# Altium PCB power_supply.PcbDoc
Units mm, origin at the board's own origin, x right, y up, seen from the top; angles counter-clockwise.
Board outline 150 x 100 mm, 2 copper layers (Top Layer, Bottom Layer); 64 components, 31 nets, 151 pads, 4 vias.
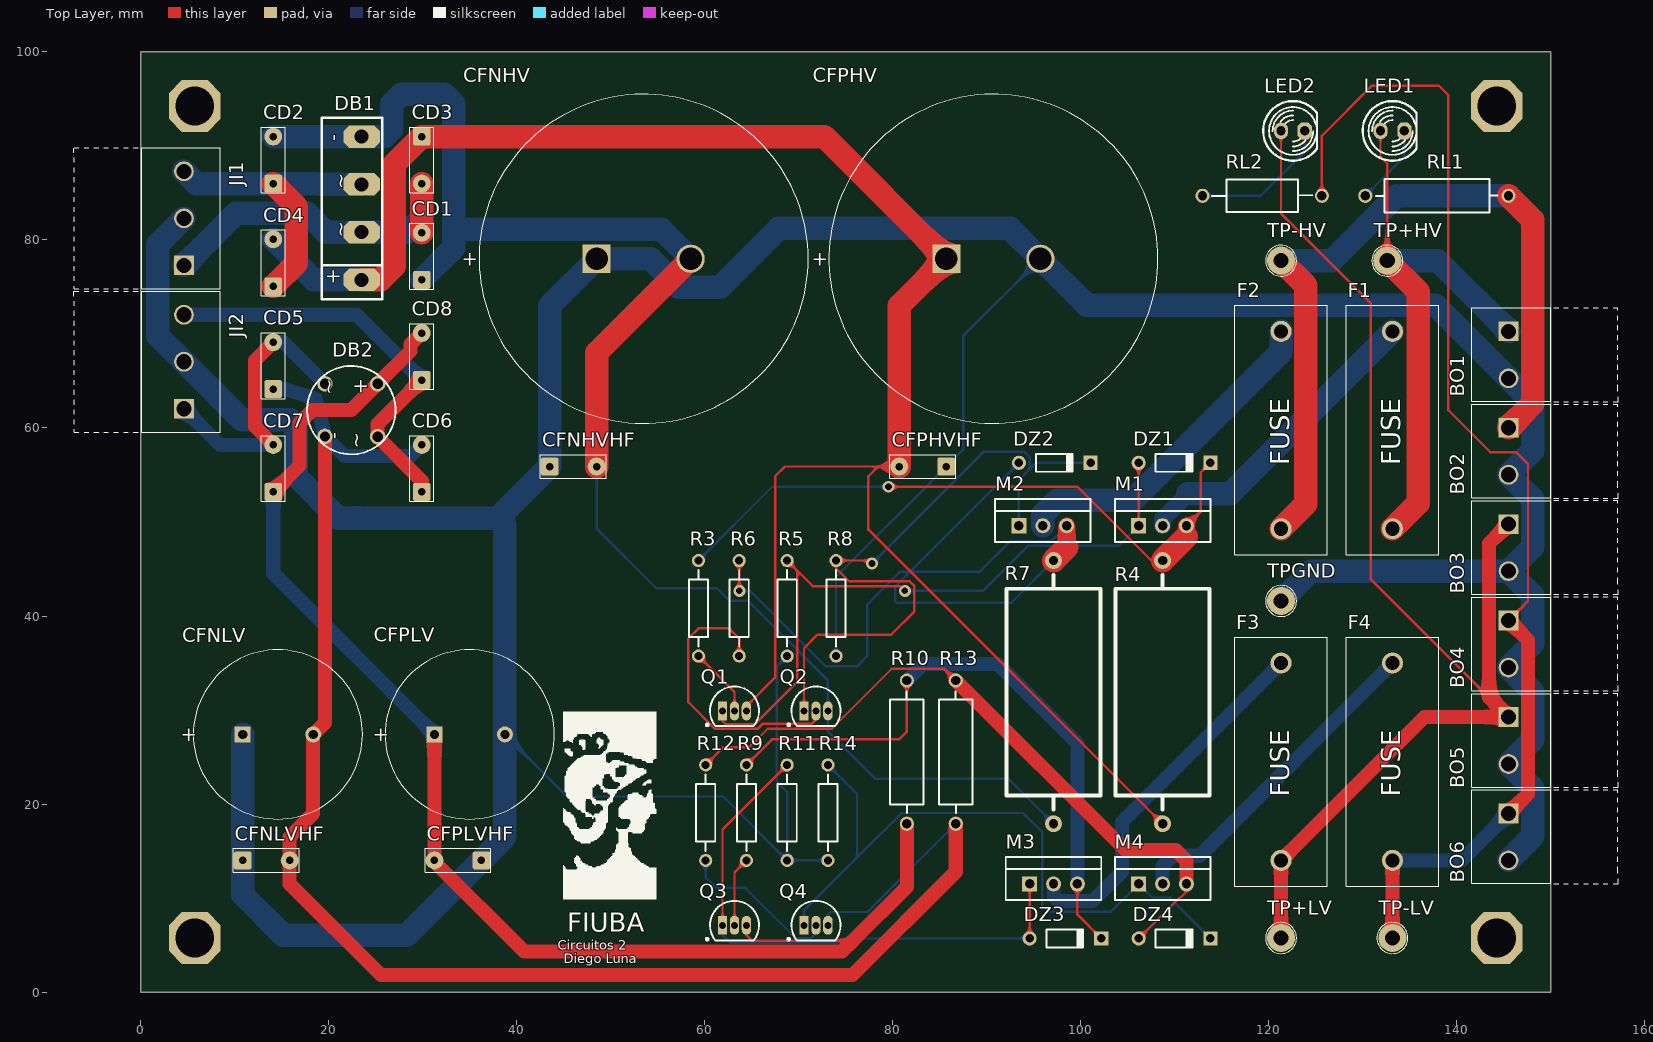
[diagram p0: Top Layer view]
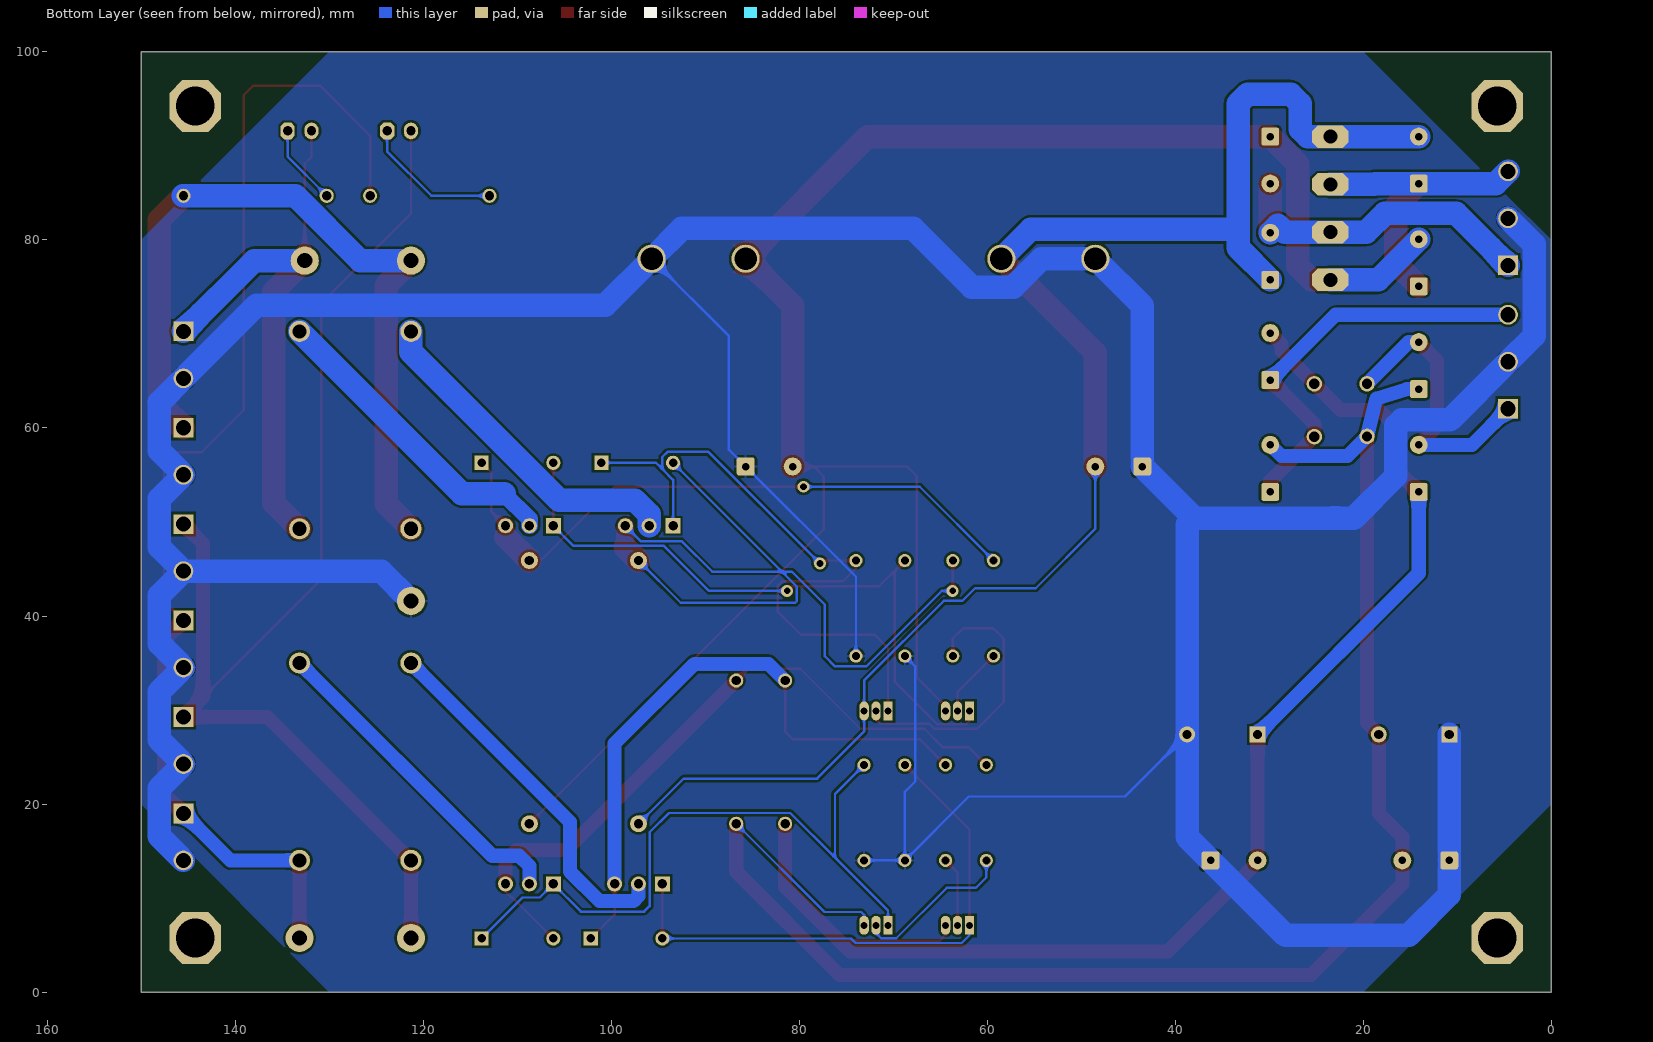
[diagram p1: Bottom Layer view, seen from below]

## Layer stack, top to bottom
Top Solder: solder mask 0.0102, Solder Resist, Dk 3.5
Top Layer: signal copper 0.0356
Dielectric 1: dielectric 0.32, FR-4, Dk 4.8
Bottom Layer: signal copper 0.0356
Bottom Solder: solder mask 0.0102, Solder Resist, Dk 3.5

## Board outline
0,0 150,0 150,100 0,100

## Design rules (kind name [scope] priority, off if disabled: settings)
Clearance [All] p1: gap=0.254 ignorepadtopadclearanceinfootprint=FALSE except(0: Arc-Hole Track-Hole SMDPad-Hole THPad-Hole Via-Hole Fill-Hole Poly-Hole Region-Hole Text-Hole)
Height [All] p1: minheight=0 maxheight=70 prefheight=12.7
HoleSize HoleSize_Exceptions [InComponent('BO') OR InComponent('JI') OR IsOctagonalPad] p1: absolutevalues=TRUE maxlimit=5 minlimit=0.025 maxpercent=80.000 minpercent=20.000
HoleSize [All] p2: absolutevalues=TRUE maxlimit=2.54 minlimit=0.025 maxpercent=80.000 minpercent=20.000
MinimumSolderMaskSliver MinimumSolderMaskSliver_Exceptions [HasFootprint('TO-92-1') OR HasFootprint('TO-225')] p1: minsoldermaskwidth=0.06
MinimumSolderMaskSliver [All] p2: minsoldermaskwidth=0.254
PolygonConnect [All] p1: connectstyle=Relief reliefconductorwidth=0.254 reliefentries=4 polygonreliefangle="90 Angle" airgapwidth=0.254
RoomDefinition power_supply [InComponentClass('power_supply')] p1: confinementstyle=ConfineIn formatcopy=TRUE lockcomponents=FALSE outline -7.2,0 157.3,0 157.3,100 -7.2,100
RoutingLayers RoutingLayers_GND [InNet('GND')] p1: top layer_v5=FALSE bottom layer_v5=TRUE
RoutingLayers [All] p2: top layer_v5=TRUE bottom layer_v5=TRUE
RoutingVias [All] p1: holewidth=0.711 width=1.27 viastyle="Through Hole" minholewidth=0.711 minwidth=1.27 maxholewidth=0.711 maxwidth=1.27
SilkToSilkClearance SilkToSilkClearance_Exceptions [OnTopSilkscreen AND IsArc vs OnTopSilkscreen AND IsText AND (StringText = '+')] p1: silktosilkclearance=0.1
SilkToSilkClearance [All] p2: silktosilkclearance=0.254
SilkToSolderMaskClearance SilkToSolderMaskClearance_Exceptions3 [(IsTrack And OnTopSilkscreen) OR (IsPad And OnCopper) vs (IsTrack And OnTopSilkscreen) OR (IsPad And OnCopper)] p1: minsilkscreentomaskgap=0 clearancetoexposedcopper=TRUE
SilkToSolderMaskClearance SilkToSolderMaskClearance_Exceptions2 [HasFootprint('LED_5MM_GREEN') OR HasFootprint('LED_5MM_YELLOW') OR HasFootprint('Tantalum Electrolytic 4.5mmx8.0mmx0.254mm-CLEAN') OR HasFootprint('Cer. pitch 5.0mm height 5.5mm') OR HasFootprint('Cer. pitch 5.08mm height 6.00mm') OR HasFootprint('Cer. pitch 5.0mm height 6.6mm') vs HasFootprint('LED_5MM_GREEN') OR HasFootprint('LED_5MM_YELLOW') OR HasFootprint('Tantalum Electrolytic 4.5mmx8.0mmx0.254mm-CLEAN') OR HasFootprint('Cer. pitch 5.0mm height 5.5mm') OR HasFootprint('Cer. pitch 5.08mm height 6.00mm') OR HasFootprint('Cer. pitch 5.0mm height 6.6mm')] p2: minsilkscreentomaskgap=0 clearancetoexposedcopper=TRUE
SilkToSolderMaskClearance SilkToSolderMaskClearance_Exceptions [HasFootprint('TP-THT-MULTI') vs HasFootprint('TP-THT-MULTI')] p3: minsilkscreentomaskgap=0.08 clearancetoexposedcopper=TRUE
SilkToSolderMaskClearance [IsPad] p4: minsilkscreentomaskgap=0.254 clearancetoexposedcopper=TRUE
SolderMaskExpansion [All] p1: expansion=0.102
Width "H Power route" [InNetClass('H Power route')] p1: maxlimit=5 minlimit=0.254 preferedwidth=0.254 // Width of low voltage power
Width "L Power route" [InNetClass('L Power route')] p2: maxlimit=3 minlimit=0.254 preferedwidth=0.254 // Width of low voltage power
Width [All] p3: maxlimit=0.508 minlimit=0.254 preferedwidth=0.254
24 further rules are at their usual default settings.

## Classes and differential pairs
net class "H Power route": +HV +HVU -HV -HVU GND HVLIN1 HVLIN2 PowerH1 PowerH2 PowerH3 PowerH4
net class "L Power route": +LV +LVU -LV -LVU GND LVLIN1 LVLIN2 PowerL1 PowerL2 PowerL3 PowerL4

## Components (designator, comment, footprint, x,y, rotation, side; value= is the part's Value field where it differs from the comment)
BO1 "Bornera +HV" TE-C-282822-2-C-PLUGGED 145.5,67.78 r270 top
BO2 "Bornera -HV" TE-C-282822-2-C-PLUGGED 145.5,57.524 r270 top
BO3 "Bornera +LV" TE-C-282822-2-C-PLUGGED 145.5,47.268 r270 top
BO4 "Bornera -LV" TE-C-282822-2-C-PLUGGED 145.5,37.012 r270 top
BO5 "Bornera +LV" TE-C-282822-2-C-PLUGGED 145.5,26.756 r270 top
BO6 "Bornera -LV" TE-C-282822-2-C-PLUGGED 145.5,16.5 r270 top
CD1 "Cer. 100n 500V 10%" "Cer. pitch 5.0mm height 5.5mm" 29.9,78.26 r90 top value=100n
CD2 "Cer. 100n 500V 10%" "Cer. pitch 5.0mm height 5.5mm" 14.1,88.5 r90 top value=100n
CD3 "Cer. 100n 500V 10%" "Cer. pitch 5.0mm height 5.5mm" 29.9,88.5 r270 top value=100n
CD4 "Cer. 100n 500V 10%" "Cer. pitch 5.0mm height 5.5mm" 14.1,77.567 r90 top value=100n
CD5 "Cer. 100n 500V 10%" "Cer. pitch 5.0mm height 5.5mm" 14.1,66.633 r90 top value=100n
CD6 "Cer. 100n 500V 10%" "Cer. pitch 5.0mm height 5.5mm" 29.9,55.7 r90 top value=100n
CD7 "Cer. 100n 500V 10%" "Cer. pitch 5.0mm height 5.5mm" 14.1,55.7 r90 top value=100n
CD8 "Cer. 100n 500V 10%" "Cer. pitch 5.0mm height 5.5mm" 29.9,67.6 r90 top value=100n
CFNHV "Al. Elect. 10000u 100V 20% 85º" "Al. Electrolytic 35.0mmx50.0mmx10mm-CLEAN" 53.5,78 r0 top value=10000µ
CFNHVHF "Cer. 100n 500V 10%" "Cer. pitch 5.0mm height 5.5mm" 46,55.9 r0 top value=100n
CFNLV "Al. Elect. 4700u 35V 20%" "Al. Electrolytic 18.0mmx36.0mmx7.5mm" 14.6,27.4 r0 top value=4700µ
CFNLVHF "Cer. 100n 500V 10%" "Cer. pitch 5.0mm height 5.5mm" 13.35,14 r0 top value=100n
CFPHV "Al. Elect. 10000u 100V 20% 85º" "Al. Electrolytic 35.0mmx50.0mmx10mm-CLEAN" 90.7,78 r0 top value=10000µ
CFPHVHF "Cer. 100n 500V 10%" "Cer. pitch 5.0mm height 5.5mm" 83.2,55.9 r180 top value=100n
CFPLV "Al. Elect. 4700u 35V 20%" "Al. Electrolytic 18.0mmx36.0mmx7.5mm" 35,27.4 r0 top value=4700µ
CFPLVHF "Cer. 100n 500V 10%" "Cer. pitch 5.0mm height 5.5mm" 33.75,14 r180 top value=100n
DB1 "KBL10" KBL 24.516,83.38 r90 top
DB2 "WM10" WOM-4 22.4,61.9 r270 top
DZ1 "1N5240B" DO-35-0.3mil 106.16,56.3 r0 top
DZ2 "1N5240B" DO-35-0.3mil 93.42,56.3 r0 top
DZ3 "1N5240B" DO-35-0.3mil 94.56,5.7 r0 top
DZ4 "1N5240B" DO-35-0.3mil 106.16,5.7 r0 top
F1 "Fuse 4A" "DINKLE FUSE HOLDER 5X20" 133.154,59.78 r90 top
F2 "Fuse 4A" "DINKLE FUSE HOLDER 5X20" 121.3,59.78 r90 top
F3 "Fuse 1.5A" "DINKLE FUSE HOLDER 5X20" 121.3,24.5 r90 top
F4 "Fuse 1.5A" "DINKLE FUSE HOLDER 5X20" 133.154,24.5 r90 top
JI1 "Bornera de conexión secundario 1 del transformador" TE-C-282822-3-C-PLUGGED 4.6,82.3 r90 top
JI2 "Bornera de conexión secundario 2 del transformador" TE-C-282822-3-C-PLUGGED 4.6,67.045 r90 top
LED1 "Alta tensión" LED_5MM_GREEN 133.154,91.6 r0 top
LED2 "Baja tensión" LED_5MM_YELLOW 122.57,91.6 r0 top
M1 "IRF5210" TO-220-FULL 108.7,49.6 r90 top value=Value
M2 "IRF540" TO-220-FULL 95.96,49.6 r90 top value=Value
M3 "IRF5210" TO-220-FULL 97.1,11.5 r90 top value=Value
M4 "IRF540" TO-220-FULL 108.7,11.5 r90 top value=Value
Q1 "BC327-25" TO-92-1 63.163,29.9 r270 top
Q2 "BC337-25" TO-92-1 71.83,29.9 r270 top
Q3 "BC327-25" TO-92-1 63.163,7.1 r270 top
Q4 "BC337-25" TO-92-1 71.83,7.1 r270 top
R3 "Resistor 10K 1/4W 5%" AXIAL-0.4-E24-0_25W-10k 59.333,40.82 r90 top value=10K
R4 "Cemented resistor 0.27 5W 5%" "Cemented resistor 0.27 5W 5%" 108.7,31.9 r90 top value=0.27
R5 "Resistor 10K 1/4W 5%" AXIAL-0.4-E24-0_25W-10k 68.767,40.82 r90 top value=10K
R6 "Resistor 10K 1/4W 5%" AXIAL-0.4-E24-0_25W-10k 63.667,40.82 r90 top value=10K
R7 "Cemented resistor 0.27 5W 5%" "Cemented resistor 0.27 5W 5%" 97.1,31.9 r90 top value=0.27
R8 "Resistor 10K 1/4W 5%" AXIAL-0.4-E24-0_25W-10k 73.967,40.82 r90 top value=10K
R9 "Resistor 10K 1/4W 5%" AXIAL-0.4-E24-0_25W-10k 64.433,19.08 r90 top value=10K
R10 "Resistor 0.62 2W 5%" AXIAL-0.6-E24-2W-0.62 81.5,25.52 r90 top value=0.62
R11 "Resistor 10K 1/4W 5%" AXIAL-0.4-E24-0_25W-10k 68.767,19.08 r90 top value=10K
R12 "Resistor 10K 1/4W 5%" AXIAL-0.4-E24-0_25W-10k 60.1,19.08 r90 top value=10K
R13 "Resistor 0.62 2W 5%" AXIAL-0.6-E24-2W-0.62 86.7,25.52 r90 top value=0.62
R14 "Resistor 10K 1/4W 5%" AXIAL-0.4-E24-0_25W-10k 73.1,19.08 r90 top value=10K
RL1 "Resistor 20K 1W 5%" AXIAL-0.6-E24-1W-20K 137.88,84.7 r180 top value=20K
RL2 "Resistor 5.6K 1/2W 5%" AXIAL-0.5-E24-0_5W-5.6K 119.3,84.7 r180 top value=5.6K
TP+HV "TESTPOINT_THT" TP-THT-MULTI 132.6,77.8 r90 top
TP+LV "TESTPOINT_THT" TP-THT-MULTI 121.3,5.75 r90 top
TP-HV "TESTPOINT_THT" TP-THT-MULTI 121.3,77.8 r90 top
TP-LV "TESTPOINT_THT" TP-THT-MULTI 133.154,5.75 r90 top
TPGND "TESTPOINT_THT" TP-THT-MULTI 121.3,41.6 r90 top
? "Comment" "FIUBA LOGO - SMALL1" 49.3,16.597 r0 top

## Footprints (in the part's own frame and the unit in brackets; to place one, negate y for a bottom-side part, rotate by r counter-clockwise, add the part's x,y. Pads: shape width x height; smd on the part's side, far side on the other; paste and mask are expansions set on the pad)
"Al. Electrolytic 18.0mmx36.0mmx7.5mm" [mm] "Polarized capacitors, Aluminum Electrolytic Capacitors, 2-Leads, Body 18.0mmx36.0mmx7.5mm"
  rect 1.7x1.7 hole 1: 1(-3.75,0)
  round 1.7 hole 1: 2(3.75,0)
  silkscreen extent -9,-9 9,9, body extent -9,-9 9,9, height 37
"Al. Electrolytic 35.0mmx50.0mmx10mm-CLEAN" [mm] "Polarized capacitors, Aluminum Electrolytic Capacitors, 2-Leads, Body 35.0mmx50.0mmx10mm"
  rect 3x3 / inner round 3 / far side round 3 hole 2.4: 1(-5,0)
  round 3 hole 2.4: 2(5,0)
  silkscreen extent -17.5,-17.5 17.5,17.5, body extent -18,-18 18,18, height 51.99
AXIAL-0.4-E24-0_25W-10k [mm] "Axial Device, Thru-Hole; 2 Leads; 0.4 in Pin Spacing"
  round 1.4 hole 0.85: 1(-5.08,0) 2(5.08,0)
  silkscreen extent -4.06,-1.02 4.06,1.02, body extent -5.38,-1.2 5.38,1.2, height 2.41
AXIAL-0.5-E24-0_5W-5.6K [mm] "Axial Device, Thru-Hole; 2 Leads; 0.5 in Pin Spacing"
  round 1.5 hole 1: 1(-6.35,0) 2(6.35,0)
  silkscreen extent -5.33,-1.73 5.33,1.73, body extent -6.73,-1.87 6.73,1.87, height 4.3
AXIAL-0.6-E24-1W-20K [mm] "Axial Device, Thru-Hole; 2 Leads; 0.6 in Pin Spacing"
  round 1.5 hole 1: 1(-7.62,0) 2(7.62,0)
  silkscreen extent -6.48,-1.78 6.48,1.78, body extent -7.97,-2.5 7.97,2.5, height 5.5
AXIAL-0.6-E24-2W-0.62 [mm] "Axial Device, Thru-Hole; 2 Leads; 0.6 in Pin Spacing"
  round 1.5 hole 1: 1(-7.62,0) 2(7.62,0)
  silkscreen extent -6.48,-1.78 6.48,1.78, body extent -8.02,-2 8.02,2, height 4.5
"Cemented resistor 0.27 5W 5%" [mm] "Cemented resistor 0.27O 5% 5W"
  round 1.8 / inner round 1.4 / far side round 1.8 hole 1: 1(-14,0) 2(14,0)
  silkscreen extent -12.5,-5 12.5,5, body extent -14.35,-5 14.35,5, height 11
"Cer. pitch 5.0mm height 5.5mm" [mm] "Radial ceramic capacitor pitch 5.0mm height 5.5mm"
  round 0.508 on Mech15: 0(0,0)
  rrect25% 1.905x1.905 hole 0.8: 1(-2.5,0)
  round 1.905 hole 0.8: 2(2.5,0)
  silkscreen extent -3.5,-1.27 3.5,1.27, body extent -2.8,-1 2.8,1, height 5.47
"DINKLE FUSE HOLDER 5X20" [mm] "5.00mm - Open Vertical PCB Header - 02p"
  round 2.25 hole 1.5: 1(-10.5,0) 2(10.5,0)
  silkscreen extent -13.25,-4.9 13.25,4.9, body extent -12.25,-4.8 12.25,4.8, height 11.7
DO-35-0.3mil [mm] "Diode, Axial; Body 3.8 x 1.9 mm (LxDia. max), Lead Dia. 0.53 mm (max)"
  round 1.5 hole 0.9: 1(0,0)
  rect 1.5x1.5 hole 0.9: 2(7.62,0)
  silkscreen extent 1.8,-0.95 5.8,0.95, body extent -0.26,-1.02 7.88,1, height 2.21
"FIUBA LOGO - SMALL1" [mm] "FIUBA LOGO"
  silkscreen extent -4.37,-6.7 5.54,13.22
KBL [mm]
  oct 2.4x3.9 hole 1.5: 1(-7.62,1.016) 2(-2.54,1.016) 3(2.54,1.016) 4(7.62,1.016)
  silkscreen extent -9.68,-1.19 9.6,5.26, body extent -9.8,-1.12 9.7,5.38, height 16.32
LED_5MM_GREEN [mil] "LED 5mm GREEN"
  oval 60x70 hole 39.37: A(-50,0)
  oct 60x70 hole 39.37: K(50,0)
  silkscreen extent -125,-125 100,125, body extent -122,-119 94,117, height 352
LED_5MM_YELLOW [mil] "LED 5mm YELLOW"
  oval 60x70 hole 39.37: A(-50,0)
  oct 60x70 hole 39.37: K(50,0)
  silkscreen extent -125,-125 100,125, body extent -118,-118 98,118, height 352
TE-C-282822-2-C-PLUGGED [mm] "5.00mm - Open Vertical PCB Header - 02p"
  rect 2.1x2.1 hole 1.6: 1(-2.5,0)
  round 2.1 hole 1.6: 2(2.5,0)
  silkscreen extent -5.02,-3.9 4.97,11.65, body extent -5.03,-3.87 4.98,11.63, height 18.43
TE-C-282822-3-C-PLUGGED [mm] "5.00mm - Open Vertical PCB Header - 03p"
  rect 2.1x2.1 hole 1.6: 1(-5,0)
  round 2.1 hole 1.6: 2(0,0) 3(5,0)
  silkscreen extent -7.5,-3.85 7.5,11.7, body extent -7.5,-3.85 7.5,11.67, height 18.43
TO-92-1 [mm] "TO, Flat Index; 3 In-Line, Axial Leads; Body Dia. 5mm; Leads 0.55 x 0.50 mm (max)"
  rect 2x1 hole 0.75: 1(0,-1.27)
  oval 2x1 hole 0.75: 2(0,0) 3(0,1.27)
  silkscreen extent -2.6,-3.02 1.6,2.6, body extent -2.49,-2.51 1.38,2.48, height 6.47
TO-220-FULL [mm] "TO-220 FULL PACKAGE"
  rect 1.6x1.6 / inner round 1.524 / far side rect 1.6x1.6 hole 1 paste+0 mask+0.051: 1(0,2.54)
  round 1.6 / inner round 1.524 / far side round 1.6 hole 1 paste+0 mask+0.051: 2(0,0) 3(0,-2.54)
  silkscreen extent -1.71,-5.08 2.86,5.08, body extent -1.65,-4.83 2.92,5.33, height 19.35
TP-THT-MULTI [mm] "Thru-hole test point loop"
  round 3 hole 1.6: 1(0,0)
  silkscreen extent -1.65,-1.65 1.65,1.65, body extent -1.6,-1.6 1.6,1.59, height 8.09
WOM-4 [mm]
  round 1.65 hole 1.1 mask-25.4: 1(-2.8,2.8) 2(2.825,2.8) 3(2.8,-2.8) 4(-2.8,-2.8)
  silkscreen extent -4.7,-4.7 4.7,4.7, body extent -4.7,-4.67 4.7,4.73, height 5.53

## Part data
BO1 BO2 BO3 BO4 BO5 BO6: library part C-282822-2-C, "TERMI-BLOK HEADER,ASSY90 2P - serie 282822 - 5.00mm", Manufacturer="TE Connectivity", ComponentLink1 Description=Manufacturer, ComponentLink1URL=http://www.te.com/usa-en/home.html, ComponentLink2 Description=Datasheet, ComponentLink2URL=http://www.te.com/usa-en/product-282822-2.html, Created Date="6 MArch 2017", NoPins=02, partNo=C-282822-2-C
CD1 CD2 CD3 CD4 CD5 CD6 CD7 CD8 CFNHVHF CFNLVHF CFPHVHF CFPLVHF: "Ceramic Capacitor 100nF 500V 10%", Tolerance=10%, Voltage=500V, Application="Medium and high voltage type range from 160V-450V used as primary side input filter in power supply, which can be used in general switching power supply, PC power supply and industrial computer power supply,server power supply, AC-DC converter, motor drive circuit DC storage filter, digital audio, digital TV, communication base station, DC-AC inverter, inverter power supply and converters etc", Characteristics="Ceramic Capacitor"
CFNHV CFPHV: "Aluminum Electrolytic Capacitor 10000µF 100V 20% 85º", Temperature=85ºC, Tolerance=20%, Voltage=100V, Application="Medium and high voltage type range from 160V-450V used as primary side input filter in power supply, which can be used in general switching power supply, PC power supply and industrial computer power supply,server power supply, AC-DC converter, motor drive circuit DC storage filter, digital audio, digital TV, communication base station, DC-AC inverter, inverter power supply and converters etc", Characteristics="Aluminum Electrolytic Capacitor"
CFNLV CFPLV: "Aluminum Electrolytic Capacitor 4700µF 35V 20%", Tolerance=20%, Voltage=35V, Application="Medium and high voltage type range from 160V-450V used as primary side input filter in power supply, which can be used in general switching power supply, PC power supply and industrial computer power supply,server power supply, AC-DC converter, motor drive circuit DC storage filter, digital audio, digital TV, communication base station, DC-AC inverter, inverter power supply and converters etc", Characteristics="Aluminum Electrolytic Capacitor"
DB1: "Single phase silicon bridge rectifier 1000V 4A", Current=4A, Voltage=1000V
DB2: "Single phase silicon bridge rectifier 1000V 1.5A", Current=1.5A, Voltage=1000V
DZ1 DZ2 DZ3 DZ4: "Zener Diode, 10V, 500mW", Manufacturer=Microsemi, Power=500mW, Code_JEDEC=DO-204-AH, ComponentLink2Description=Datasheet, ComponentLink2URL=https://www.microsemi.com/document-portal/doc_download/5906-1n746-759a-4370-4372a-datasheet, ComponentLink3Description="Microsemi product information", ComponentLink3URL=https://www.microsemi.com/existing-parts/parts/121290#resources, DatasheetDocument=1997, IZT=20mA, LatestRevisionDate=17-Jul-2002, LatestRevisionNote="Re-released for DXP Platform.", PackageReference=DO-35, PartNumber=1N5240B, Published=8-Jun-2000, Publisher="Altium Limited", ZV=10V
F1 F2 F3 F4: library part "Fuse Holder", "Fuse", PackageDescription="Thru-Hole; 2 Leads"
JI1 JI2: library part C-282822-3-C, "TERMI-BLOK HEADER,ASSY90 3P - serie 282822 - 5.00mm", Manufacturer="TE Connectivity", ComponentLink1 Description=Manufacturer, ComponentLink1URL=http://www.te.com/usa-en/home.html, ComponentLink2 Description=Datasheet, ComponentLink2URL=http://www.te.com/usa-en/product-282822-3.html, Created Date="6 MArch 2017", NoPins=03, partNo=C-282822-3-C
LED1: library part "LED (GREEN)", "Typical LED (GREEN)", Publisher="Altium Limited"
LED2: library part "LED (YELLOW)", "Typical LED (YELLOW)", Publisher="Altium Limited"
M1 M3: "P-CHANNEL Power MOSFET 100V - 40A -  0.06O", Manufacturer_Name=Infineon, Power=200W, C="Copyright (C) 2015 Accelerated Designs. All rights reserved", Copyright="Copyright (C) 2015 Accelerated Designs. All rights reserved", Family=MOSFET, Manufacturer_Part_Number=IRF5210, Section=Discretes, Supersection=Semiconductors, Vendor=Infineon
M2 M4: "N-CHANNEL Power MOSFET 100V - 20A -  0.077O", Manufacturer_Name=Vishay, Power=150, C="Copyright (C) 2015 Accelerated Designs. All rights reserved", Copyright="Copyright (C) 2015 Accelerated Designs. All rights reserved", Family=MOSFET, Manufacturer_Part_Number=IRF540, Section=Discretes, Supersection=Semiconductors, Vendor=Vishay
Q1 Q3: "PNP Bipolar Transistor", Manufacturer="ON Semiconductor", PartNumber=MJE340G, Power=20W, ComponentLink1Description="ON semiconductor product information", ComponentLink1URL=https://www.onsemi.com/PowerSolutions/product.do?id=BC327-25, ComponentLink2Description=Datasheet, ComponentLink2URL=https://www.onsemi.com/pub/Collateral/BC327-D.PDF, IC=500mA, VCB=300V, VCEO=300V
Q2 Q4: "NPN Bipolar Transistor", Manufacturer="ON Semiconductor", PartNumber=MJE340G, Power=20W, ComponentLink1Description="ON semiconductor product information", ComponentLink1URL=https://www.onsemi.com/PowerSolutions/product.do?id=BC337-25, ComponentLink2Description=Datasheet, ComponentLink2URL=https://www.onsemi.com/pub/Collateral/BC337-D.PDF, IC=500mA, VCB=300V, VCEO=300V
R3 R5 R6 R8 R9 R11 R12 R14: "Resistor 10KO 1/4W 5%", Power=1/4W, Tolerance=5%, Type="(TH) Metal film"
R4 R7: "Cemented resistor 0.27O 5% 5W", Power=5W, Tolerance=5%, Type="(TH) Wired cemented"
R10 R13: "Resistor 0.62O 2W 5%", Power=2W, Tolerance=5%, Type="(TH) Carbon film"
RL1: "Resistor 20KO 1W 5%", Power=1W, Tolerance=5%, Type="(TH) Carbon film"
RL2: "Resistor 5.6KO 1/2W 5%", Power=1/2W, Tolerance=5%, Type="(TH) Metal film"
TP+HV TP+LV TP-HV TP-LV TPGND: "Test Point PCB mount Multi-purpose Black", Manufacturer 1="Keystone Electronics", Manufacturer Part Number 1=5014, PBL Part Number=3100-xxx, Supplier Part Number 1=5014K-ND, Description 1="TEST POINT PC MULTI PURPOSE YEL", Material="Base, Nylon 46, UL 94V-0", Mounting Type="0.063\" (1.600mm) Hole Diameter", Supplier 1=Digi-Key

## Free pads (board coordinates)
  oct 5.5x5.5 hole 4.1: -(5.75,5.75) -(5.75,94.25) -(144.25,5.75) -(144.25,94.25)

## Via types
v1: diameter 1.27, hole 0.711, Top Layer to Bottom Layer, 4 vias

## Nets (pads, with @x,y where several pads share a name; then routed paths per layer and width w, separated by ;. In a path a pad name is that pad's centre, name@x,y a point inside that pad or via, vN(x,y) a via of type N, cw(c..) or ccw(c..) an arc to the next point about the centre after c; other vN are vias at no path point)
+HV: BO1.1 F1.1 LED1.A TP+HV.1 | length 61.1
  Top Layer w0.254: LED1.A 131.884,88.817 132.6,88.101 TP+HV.1
  Top Layer w2.5: TP+HV.1 135.89,74.51 135.89,52.016 F1.1
  Bottom Layer w2.5: TP+HV.1 137.98,77.8 BO1.1
+HVU: CD3.1 CD4.2 CFPHV.1 CFPHVHF.2 DB1.1 Q1.3 R4.1 | length 206.9
  Top Layer w0.254: Q1.3 64.433,30.404 67.488,33.458 67.488,54.864 68.524,55.9 78.442,55.9 ; CFPHVHF.2 78.442,55.9 ; R4.1 77.406,49.194 77.406,54.864 78.442,55.9
  Top Layer w2.5: DB1.1 25.519,75.76 26.975,77.216 26.975,88.075 CD3.1 72.7,91 CFPHV.1 80.7,73 CFPHVHF.2
  Bottom Layer w2.5: CD4.2 18.407,75.76 DB1.1
+LV: BO3.1 BO5.1 F3.1 LED2.A TP+LV.1 | length 130.4
  Top Layer w0.254: LED2.A 121.3,82.814 130.861,73.254 130.861,43.895 143.434,31.322
  Top Layer w1.5: TP+LV.1 F3.1 136.556,29.256 BO5.1 143.434,31.322 143.434,47.702 BO3.1
+LVU: CD7.1 CD8.2 CFPLV.1 CFPLVHF.2 DB2.1 Q3.3 R10.1 | length 148.8
  Top Layer w0.254: Q3.3 64.433,6.052 65.024,5.461 75.761,5.461 75.768,5.461 75.765,5.465
  Top Layer w1.5: CD7.1 16.891,55.991 16.891,60.503 18.288,61.9 22.4,61.9 DB2.1 28.702,68.202 28.702,68.902 CD8.2 ; CFPLVHF.2@31.1,14 40.8,4.3 74.6,4.3 75.761,5.461 75.765,5.465 81.5,11.2 R10.1 ; CFPLVHF.2 CFPLV.1
  Bottom Layer w1.5: CD7.1 14.1,44.55 CFPLV.1
-HV: BO2.1 F2.1 RL1.1 TP-HV.1 | length 84.6
  Top Layer w2.5: F2.1 123.952,51.932 123.952,75.148 TP-HV.1 ; BO2.1 148.057,62.581 148.057,82.143 RL1.1
  Bottom Layer w2.5: TP-HV.1 126.695,77.8 133.595,84.7 RL1.1
-HVU: CD1.1 CD2.2 CFNHV.2 CFNHVHF.2 DB1.4 Q2.3 R7.1 | length 167.3
  Top Layer w2.5: CFNHVHF.2 48.5,68 CFNHV.2
  Bottom Layer w0.254: CFNHVHF.2 48.5,49.29 54.839,42.951 61.309,42.951 62.658,41.603 64.62,41.603 73.1,33.123 Q2.3 73.1,27.711 78.104,22.708 92.292,22.708 R7.1
  Bottom Layer w2.5: CD2.2 DB1.4 25.908,91 26.695,91.787 26.695,94.488 27.711,95.504 32.309,95.504 33.325,94.488 33.325,81.128 ; CD1.1 33.325,79.185 33.325,81.128 ; CFNHV.2 55.372,81.128 33.325,81.128
-LV: BO4.1 BO6.1 F4.1 RL2.1 TP-LV.1 | length 129.2
  Top Layer w0.254: RL2.1 125.65,91.081 130.988,96.418 138.074,96.418 139.09,95.402 139.09,61.9 143.561,57.429 146.304,57.429 147.574,56.159 147.574,41.586 BO4.1
  Top Layer w1.5: TP-LV.1 F4.1 ; BO6.1 147.574,21.074 147.574,37.438 BO4.1
  Bottom Layer w1.5: F4.1 140.5,14 BO6.1
-LVU: CD5.1 CD6.2 CFNLV.2 CFNLVHF.2 DB2.3 Q4.3 R13.1 | length 172.9
  Top Layer w1.5: DB2.3 19.6,28.65 CFNLV.2 18.35,19 15.85,16.5 CFNLVHF.2 15.85,11.5 25.55,1.8 75.7,1.8 86.7,12.8 R13.1
  Bottom Layer w0.254: Q4.3 73.1,8.203 73.406,8.509 77.309,8.509 R13.1
  Bottom Layer w1.5: CD5.1 15.382,64.133 18.613,63.108 DB2.3 21.698,57.002 28.702,57.002 CD6.2
GND: BO1.2 BO2.2 BO3.2 BO4.2 BO5.2 BO6.2 CFNHV.1 CFNHVHF.1 CFNLV.1 CFNLVHF.1 CFPHV.2 CFPHVHF.1 CFPLV.2 CFPLVHF.1 JI1.2 JI2.2 R5.1 R8.1 R11.1 R14.1 TPGND.1 | length 488.3
  Bottom Layer w0.254: 15.926,60.858 16.557,60.228 ; 22.352,51.435 23.368,50.419 ; 38.019,50.419 38.75,49.688 ; CFPLV.2 45.35,20.8 61.967,20.8 R11.1 R11.1@68.767,14.021 ; R5.1 67.666,34.639 67.666,22.403 68.767,21.302 R11.1@68.767,14.021 ; R14.1 70.942,14 70.921,14.021 R11.1@68.767,14.021 ; R8.1 73.967,44.167 CFPHVHF.1 87.478,57.678 87.478,69.778 CFPHV.2
  Bottom Layer w2.5: JI1.2 1.827,79.527 1.827,69.818 JI2.2 10.787,60.858 15.926,60.858 ; CFNLV.1 CFNLVHF.1 10.85,10.35 15.18,6.02 28.27,6.02 CFPLVHF.1 38.75,16.5 CFPLV.2 38.75,49.688 ; 16.557,60.228 16.557,54.864 21.002,50.419 23.368,50.419 38.019,50.419 CFNHVHF.1 43.5,73 CFNHV.1 54.232,78 57.236,74.996 61.646,74.996 67.879,81.229 92.471,81.229 CFPHV.2 100.65,73.05 137.73,73.05 BO1.2 148.057,62.723 148.057,57.581 BO2.2 148.057,52.467 148.057,47.325 BO3.2 ; TPGND.1 124.468,44.768 BO3.2 ; BO6.2 148.057,16.557 148.057,21.699 BO5.2 148.057,26.813 148.057,31.955 BO4.2 148.057,37.069 148.057,42.211 BO3.2
HVLIN1: CD1.2 CD3.2 DB1.2 JI1.1 | length 34.3
  Top Layer w2.5: CD1.2 CD3.2
  Bottom Layer w2.5: JI1.1 10.121,82.821 17.704,82.821 19.685,80.84 DB1.2 28.346,80.84 29.083,81.577 CD1.2
HVLIN2: CD2.1 CD4.1 DB1.3 JI1.3 | length 32.4
  Top Layer w2.5: CD4.1 16.561,77.527 16.561,83.539 CD2.1
  Bottom Layer w2.5: JI1.3 5.9,86 CD2.1 18.745,86 18.825,85.92 DB1.3
LVLIN1: CD5.2 CD7.2 DB2.4 JI2.1 | length 31
  Top Layer w1.5: CD7.2 12.141,60.159 12.141,67.175 CD5.2
  Bottom Layer w1.5: JI2.1 8.445,58.2 CD7.2 ; CD5.2 15.167,69.133 DB2.4
LVLIN2: CD6.1 CD8.1 DB2.2 JI2.3 | length 44
  Top Layer w1.5: CD6.1 29.9,54.375 DB2.2 25.2,60.4 CD8.1
  Bottom Layer w1.5: JI2.3 22.955,72.045 CD8.1
NetDZ1_1: DZ1.1 M1.1 Q1.1 R5.2 | length 71.1
  Top Layer w0.254: Q1.1 61.893,28.835 62.23,28.499 65.329,28.499 69.85,33.02 69.85,44.817 ; R5.2 69.85,44.817 ; v1(81.28,42.672) 80.772,43.18 71.487,43.18 69.85,44.817 ; M1.1 DZ1.1
  Bottom Layer w0.254: v1(81.28,42.672) 89.611,42.672 94.4,47.461 104.021,47.461 M1.1
NetDZ2_2: DZ2.2 M2.1 Q2.1 R8.2 | length 73.1
  Top Layer w0.254: Q2.1 70.56,36.576 72.007,38.023 79.831,38.023 82.296,40.488 82.296,43.18 81.788,43.688 75.362,43.688 73.967,45.083 R8.2 77.493,45.9 v1(77.8,45.593)
  Bottom Layer w0.254: v1(77.8,45.593) 89.662,57.455 94.005,57.455 94.564,56.896 94.564,55.627 ; M2.1 93.42,54.483 94.564,55.627 ; DZ2.2 95.237,56.3 94.564,55.627
NetDZ3_1: DZ3.1 M3.1 Q3.1 R11.2 | length 60
  Top Layer w0.254: Q3.1 61.893,17.287 R11.2 ; DZ3.1 94.564,5.704 94.564,8.941 94.56,8.945 M3.1
  Bottom Layer w0.254: Q3.1 61.893,6.037 62.719,5.211 74,5.211 74.489,5.7 DZ3.1
NetDZ4_2: DZ4.2 M4.1 Q4.1 R14.2 | length 72.8
  Bottom Layer w0.254: Q4.1 70.56,8.66 76.2,14.3 ; R14.2 76.2,21.06 76.2,14.3 ; DZ4.2 109.422,10.058 107.602,10.058 M4.1 103.22,8.56 96.495,8.56 95.91,9.144 95.91,16.993 93.853,19.05 80.95,19.05 76.2,14.3
NetLED1_K: LED1.K RL1.2 | length 8.6
  Bottom Layer w0.254: RL1.2 134.424,88.864 LED1.K
NetLED2_K: LED2.K RL2.2 | length 15
  Bottom Layer w0.254: RL2.2 119.132,84.7 123.84,89.408 LED2.K
NetQ1_2: Q1.2 R3.1 | length 7.4
  Top Layer w0.254: R3.1 63.163,31.91 Q1.2
NetQ2_2: Q2.2 R6.1 | length 31
  Top Layer w0.254: R6.1 63.667,37.592 62.574,38.684 59.334,38.684 58.242,37.592 58.242,30.836 61.087,27.991 65.608,27.991 66.136,28.519 71.342,28.519 71.83,29.007 Q2.2
NetQ3_2: Q3.2 R9.1 | length 7.4
  Top Layer w0.254: Q3.2 63.163,12.73 R9.1
NetQ4_2: Q4.2 R12.1 | length 17.3
  Bottom Layer w0.254: R12.1 60.1,12.192 61.192,11.1 64.298,11.1 69.679,5.719 71.301,5.719 71.83,6.248 Q4.2
PowerH1: DZ1.2 M1.3 R3.2 R4.2 | length 68.4
  Top Layer w0.254: v1(79.553,53.746) 99.644,53.746 107.491,45.9 R4.2 ; M1.3 112.776,51.136 112.776,55.296 DZ1.2
  Top Layer w1.778: 111.24,48.44 M1.3
  Top Layer w2.5: R4.2 111.24,48.44
  Bottom Layer w0.254: R3.2 67.18,53.746 v1(79.553,53.746)
PowerH2: F1.2 M1.2 | length 33.4
  Bottom Layer w1.778: M1.2 108.7,50.318 111.382,53
  Bottom Layer w2.5: 111.382,53 115.874,53 F1.2
PowerH3: DZ2.1 M2.3 R6.2 R7.2 | length 94
  Top Layer w0.254: R6.2 63.667,42.683 v1(63.678,42.672)
  Top Layer w1.778: 98.5,47.3 M2.3
  Top Layer w2.5: R7.2 98.5,47.3
  Bottom Layer w0.254: v1(63.678,42.672) 64.846,42.672 72.873,34.646 76.2,34.646 77.292,35.738 77.292,41.224 80.772,44.704 81.824,44.704 ; DZ2.1 81.824,44.704 ; R7.2 92.602,41.402 80.424,41.402 80.264,41.562 80.264,43.144 81.824,44.704 ; M2.3 96.869,47.969 92.507,47.969 89.242,44.704 81.824,44.704
PowerH4: F2.2 M2.2 | length 35.9
  Bottom Layer w2.5: M2.2 95.96,50.8 97.488,52.328 105.541,52.328 121.3,68.087 F2.2
PowerL1: DZ3.2 M3.3 R9.2 R10.2 | length 68.1
  Top Layer w0.254: R9.2 67.147,26.873 80.645,26.873 81.5,27.728 R10.2 ; M3.3 99.64,8.24 DZ3.2
  Bottom Layer w1.5: R10.2 83.26,34.9 91.161,34.9 99.64,26.42 M3.3
PowerL2: F3.2 M3.2 | length 39.3
  Bottom Layer w1.5: M3.2 97.1,10.204 97.608,9.696 101.263,9.696 104.369,12.802 104.369,18.069 F3.2
PowerL3: DZ4.1 M4.3 R12.2 R13.2 | length 74.3
  Top Layer w0.254: R12.2 61.958,26.018 64.708,26.018 66.7,28.011 73.502,28.011 79.883,34.392 85.448,34.392 R13.2 ; DZ4.1 110.518,10.058 110.63,10.058 111.24,10.668 M4.3
  Top Layer w1.5: R13.2 104.74,15.1 110.1,15.1 111.24,13.96 M4.3
PowerL4: F4.2 M4.2 | length 35.3
  Bottom Layer w1.5: M4.2 108.7,13.396 109.804,14.5 112.654,14.5 F4.2
pads on no net: CD1.0 CD2.0 CD3.0 CD4.0 CD5.0 CD6.0 CD7.0 CD8.0 CFNHVHF.0 CFNLVHF.0 CFPHVHF.0 CFPLVHF.0

## Polygon pours and split planes (outlines as drawn)
GND on Bottom Layer "Bottom Layer-GND" (solid, pour order 2): 0,80 20,100 130,100 150,80 150,20 130,0 20,0 0,20
+LV on Bottom Layer "Bottom Layer-+LV" (solid, pour order 0): 0,85

## Silkscreen, mask and mechanical layers (free items; w line width, h text height)
Top Overlay:
  text "Circuitos 2" at 44.375,4.522 h1
  text "Diego Luna" at 45.025,3.047 h1
Mechanical 3:
  the board outline again, w0.1

## Text inside footprints (layer, text, board x,y; h text height)
CFNHV: Top Overlay "+" at 34.175,77.263 h1.5
CFNLV: Top Overlay "+" at 4.275,26.663 h1.5
CFPHV: Top Overlay "+" at 71.375,77.263 h1.5
CFPLV: Top Overlay "+" at 24.675,26.663 h1.5
DB1: Top Overlay "+" at 21.189,75.227 h1.52 r90; Top Overlay "-" at 21.189,90.517 h1.52 r90; Top Overlay "~" at 21.976,80.256 h1.52 r90; Top Overlay "~" at 21.976,85.412 h1.52 r90
DB2: Top Overlay "-" at 20.114,59.563 h1.5 r270; Top Overlay "~" at 22.324,59.563 h1.5 r270; Top Overlay "~" at 19.428,65.253 h1.5 r270; Top Overlay "+" at 22.756,65.278 h1.5 r270
F1: Top Overlay "FUSE" at 134.004,56.03 h2 r90
F2: Top Overlay "FUSE" at 122.15,56.03 h2 r90
F3: Top Overlay "FUSE" at 122.15,20.75 h2 r90
F4: Top Overlay "FUSE" at 134.004,20.75 h2 r90
?: Top Overlay "FIUBA" at 45.363,6.437 h2